# EAGLE board prototype_WLCSP (EAGLE 7.7.0)

Size 160 x 100 mm. Coordinates in mm from the lower left corner, seen from the top.
Outline: 0,0 160,0 160,100 0,100 0,0
Copper layers (1*16): Top 0.035mm / dielectric 1.5mm / Bottom 0.035mm
Design rules "default": minimum track width 10mil, minimum drill 24mil, track to track 8mil, track to pad 8mil, pad to pad 8mil, via to via 8mil, smd to smd 8mil, copper to edge 40mil, drill to drill 8mil, minimum pad ring 10mil, minimum via ring 8mil, stop-mask expansion 4mil, vias tented up to drill 0mil, thermal gap 10mil

## Footprints (pad centres in the part's own frame; a part is rotated, then mirrored left to right if it is on the bottom)
SPARK_USB-MICROB = smd 0.35 x 1.4: D+ 0,2.65; D- -0.65,2.65; GND 1.3,2.65; ID 0.65,2.65; VBUS -1.3,2.65 | smd 1.8 x 1.9: MT1 -4,0; MT2 4,0 | smd 1.9 x 1.9: P$1 -1.27,0; P$2 1.27,0
SPARK_TACTILE_SWITCH_SMD = smd 1.25 x 0.65: 1 -1.875,0.775; 2 1.875,0.775; 3 -1.875,-0.775; 4 1.875,-0.775
STM32F205_WLCSP = smd 0.22 x 0.22: BOOT0 2,-0.4; IRROFF 2.8,-0.8; NRST 2.8,-1.6; OSC_IN 3.2,-1.6; OSC_OUT 3.2,-2; PA0 2.4,-1.6; PA1 2.8,-2.8; PA2 3.2,-3.2; PA3 2.4,-2.4; PA4 2.8,-3.2; PA5 2,-2.8; PA6 1.6,-2.8; PA7 2.4,-3.2; PA8 0.4,-1.6; PA9 0.8,-1.6; PA10 0.8,-1.2; PA11 0.4,-1.2; PA12 0,-0.8; PA13 0.4,-0.4; PA14 0,0; PA15 0.4,0; PB0 2,-3.2; PB1 1.6,-3.2; PB2 1.2,-3.2; PB3 1.2,0; PB4 1.2,-0.4; PB5 1.6,0; PB6 1.6,-0.4; PB7 2,0; PB8 2.4,-0.4; PB9 2.4,0; PB10 0.8,-2.8; PB11 0.4,-3.2; PB12 0,-3.2; PB13 0.4,-2.8; PB14 0,-2.8; PB15 0,-2.4; PC0 3.2,-2.4; PC1 2.8,-2; PC2 2.4,-1.2; PC3 2.8,-2.4; PC4 1.2,-2.8; PC5 0.8,-2.4; PC6 0.4,-2.4; PC7 0.4,-2; PC8 0.8,-2; PC9 0,-1.2; PC10 0.8,-0.4; PC11 0.8,-0.8; PC12 0.8,0; PC13 2.8,-0.4; PC14 3.2,-0.4; PC15 3.2,-0.8; PD2 2.4,-0.8; REGOFF 2.4,-2.8; VBAT 3.2,0; VCAP_1 0.8,-3.2; VCAP_2 0.4,-0.8; VDD_2 2.8,0; VDD_3 3.2,-1.2; VDD_4 0,-1.6; VREF+ 2.4,-2; VSS_2 0,-0.4; VSS_3 2.8,-1.2; VSS_4 0,-2; VSS_5 3.2,-2.8
SPARK_R0402_B = smd 0.457 x 0.61: 1 -0.483,0; 2 0.483,0
SPARK_C0402_B = smd 0.457 x 0.61: 1 -0.483,0; 2 0.483,0

## Placement (x,y rotation side)
JP1  SPARK_USB-MICROB  [SPARK_USB-MICROB]  -6.35,3.81 270 top  (outside the outline)
S1  [SPARK_TACTILE_SWITCH_SMD]  -11.43,-5.08 0 top  (outside the outline)
S2  [SPARK_TACTILE_SWITCH_SMD]  -11.43,-10.16 0 top  (outside the outline)
U$1  BRETTS-SPARK-LIBRARY_STM32F20XR  [STM32F205_WLCSP]  2.54,5.08 0 top
U$3  SPARK_R-US_  [SPARK_R0402_B]  -1.27,3.81 180 top
U$4  SPARK_R-US_  [SPARK_R0402_B]  -1.27,5.08 180 top
U$5  SPARK_C-US  [SPARK_C0402_B]  -17.78,-8.89 0 top  (outside the outline)
U$6  SPARK_C-US  [SPARK_C0402_B]  -21.59,-8.89 0 top  (outside the outline)

## Library data of the parts
JP1 = electron_v020; PROD_ID: CONN-09505
S1 S2 U$1 U$3-U$6 = electron_v020

## Nets
+3V3: U$1.VBAT U$1.VDD_2 U$1.VDD_3 U$1.VDD_4
IRROFF: U$1.IRROFF
N$1: JP1.D+ U$3.2
N$2: JP1.D- U$4.2
N$5: U$1.VCAP_2 U$5.1
N$6: U$1.VCAP_1 U$6.1
N$8: U$1.VSS_2 U$1.VSS_3 U$1.VSS_4 U$1.VSS_5
NRST: U$1.NRST
USB+: U$1.PA12 U$3.1
USB-: U$1.PA11 U$4.1
VREF+: U$1.VREF+

## Tracks (layer width: path | path; a pad name or v marks a point on that pad's centre or on a via)
+3V3  (3 unrouted)
N$1  (1 unrouted)
N$2  (1 unrouted)
N$5  (1 unrouted)
N$6  (1 unrouted)
N$8  (3 unrouted)
USB+  (1 unrouted)
USB-  (1 unrouted)